# Altium PCB GateWay V1.1.PcbDoc (part 1 of 3)
Units mil, origin at the board's own origin, x right, y up, seen from the top; angles counter-clockwise.
Board outline 3543.31 x 4133.86 mil, 2 copper layers (Top Layer, Bottom Layer); 174 components, 139 nets, 614 pads, 376 vias.
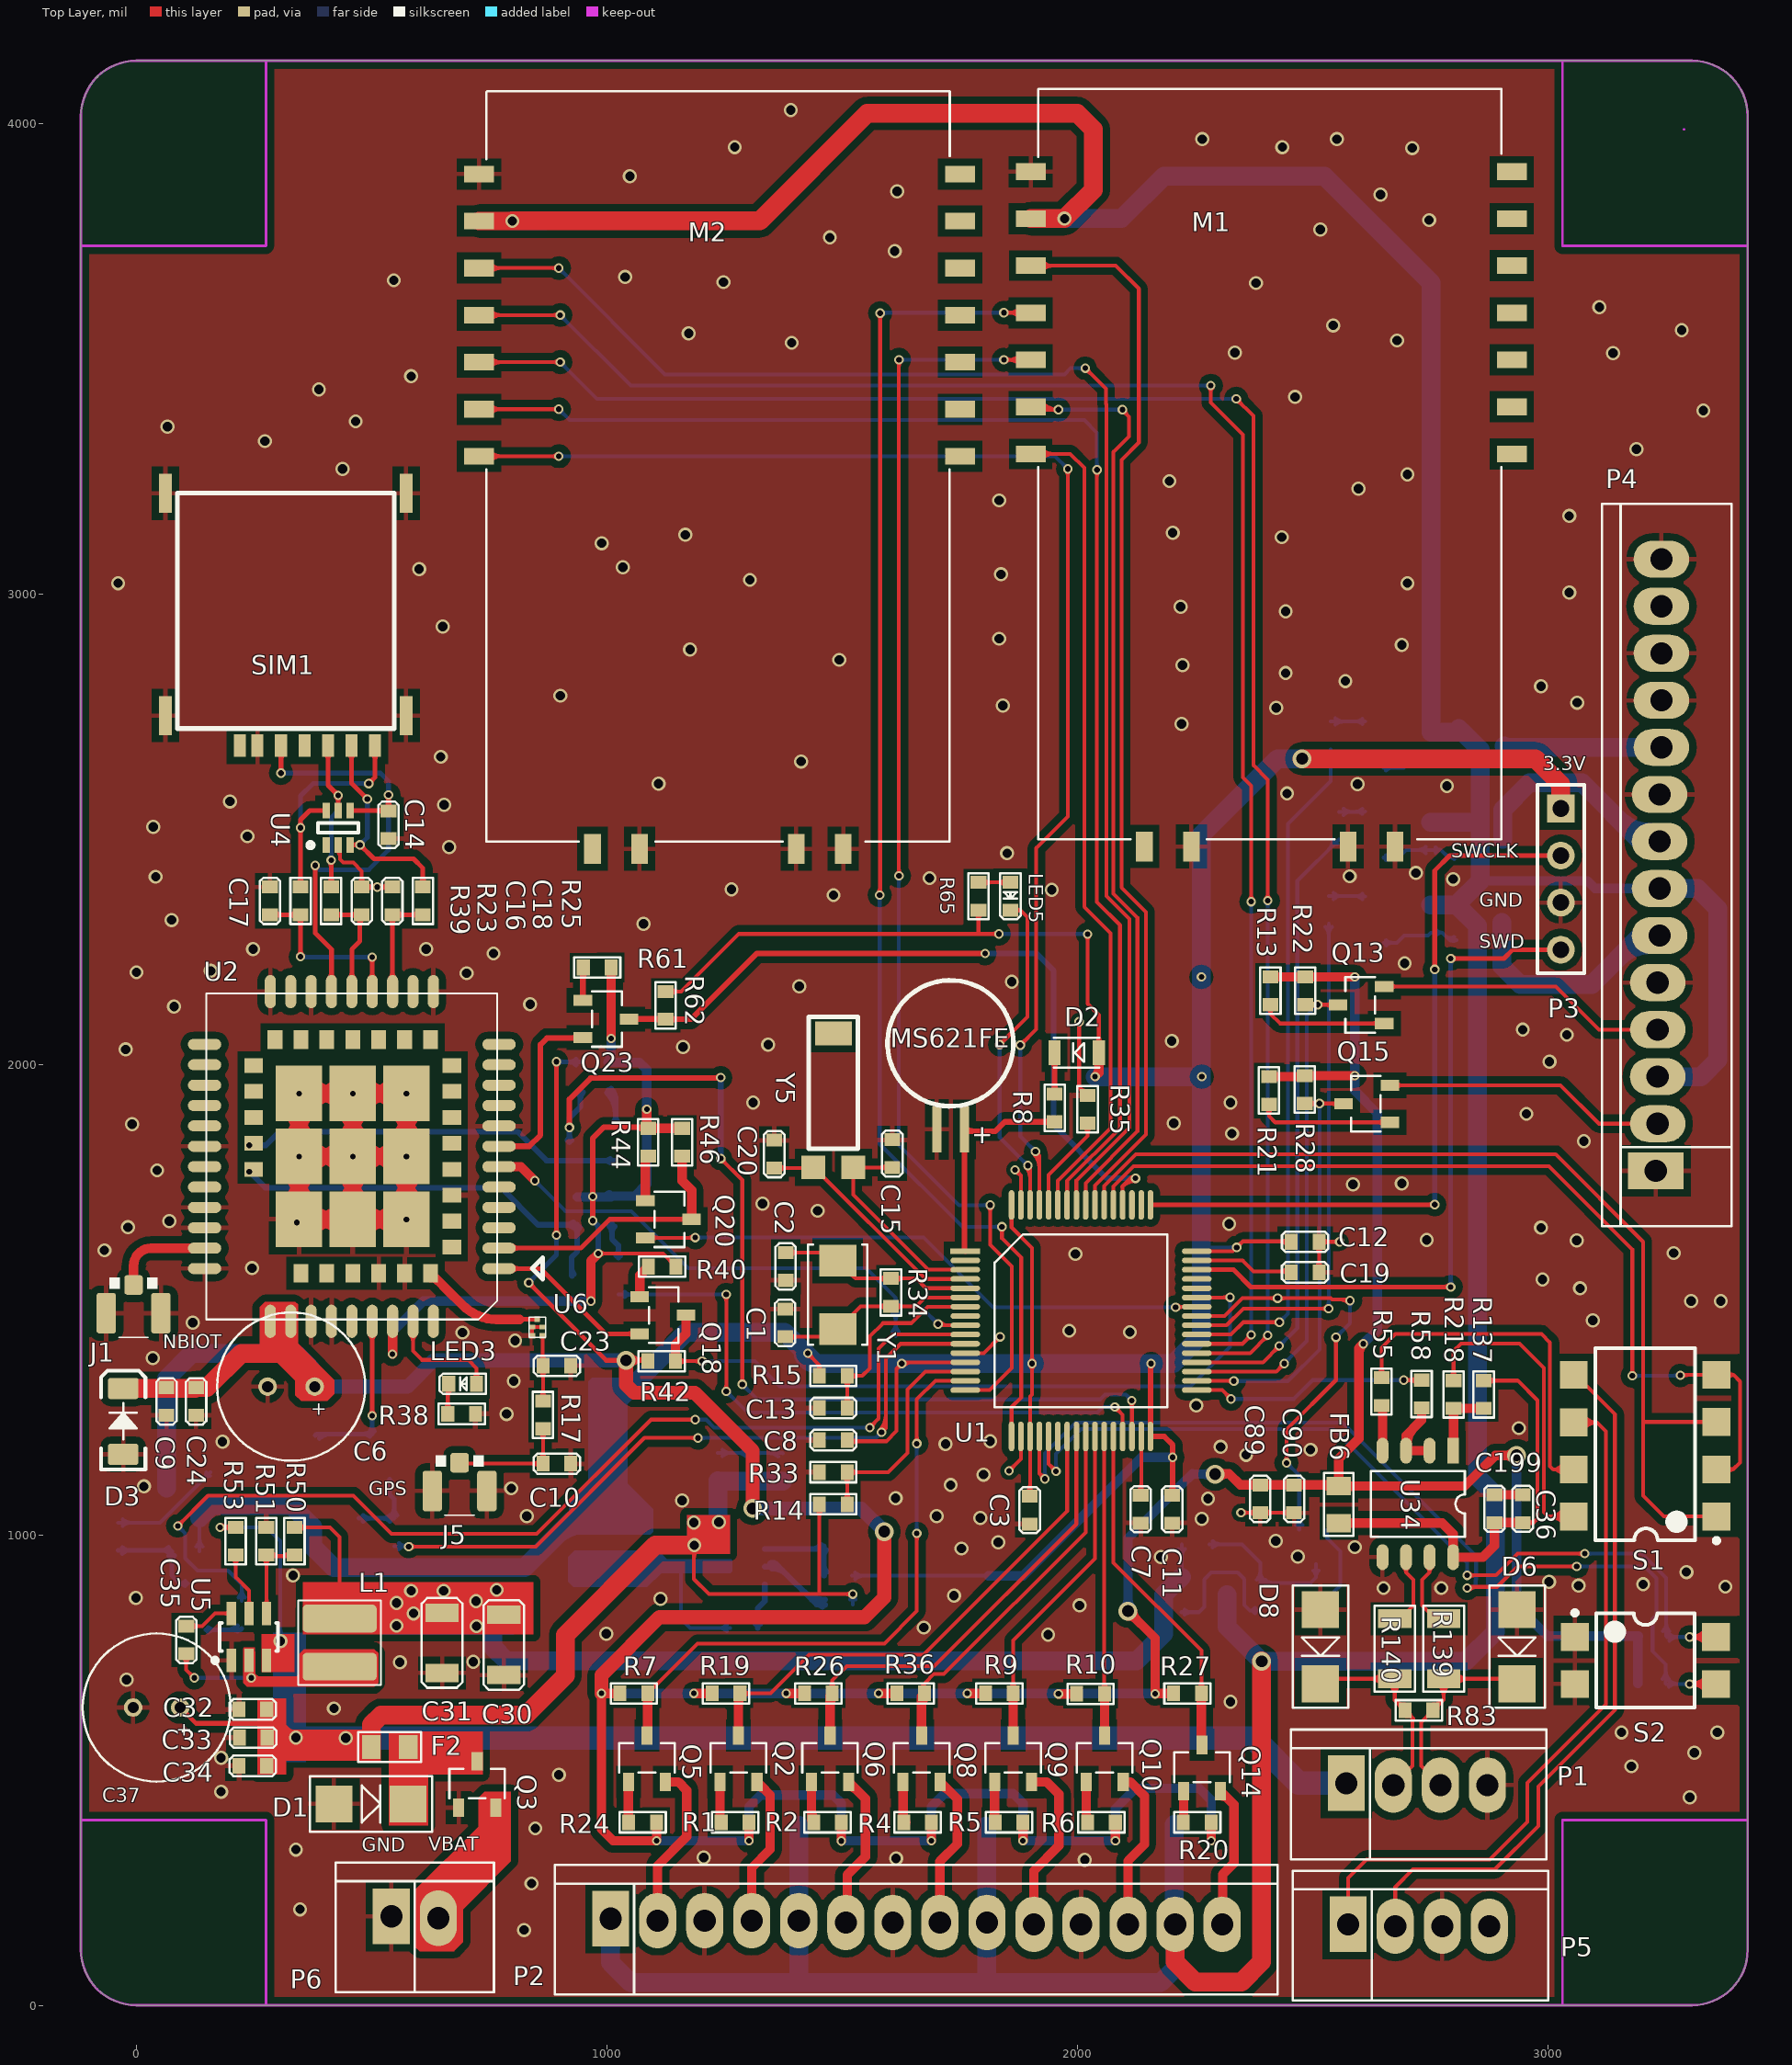
[diagram p0: Top Layer view]
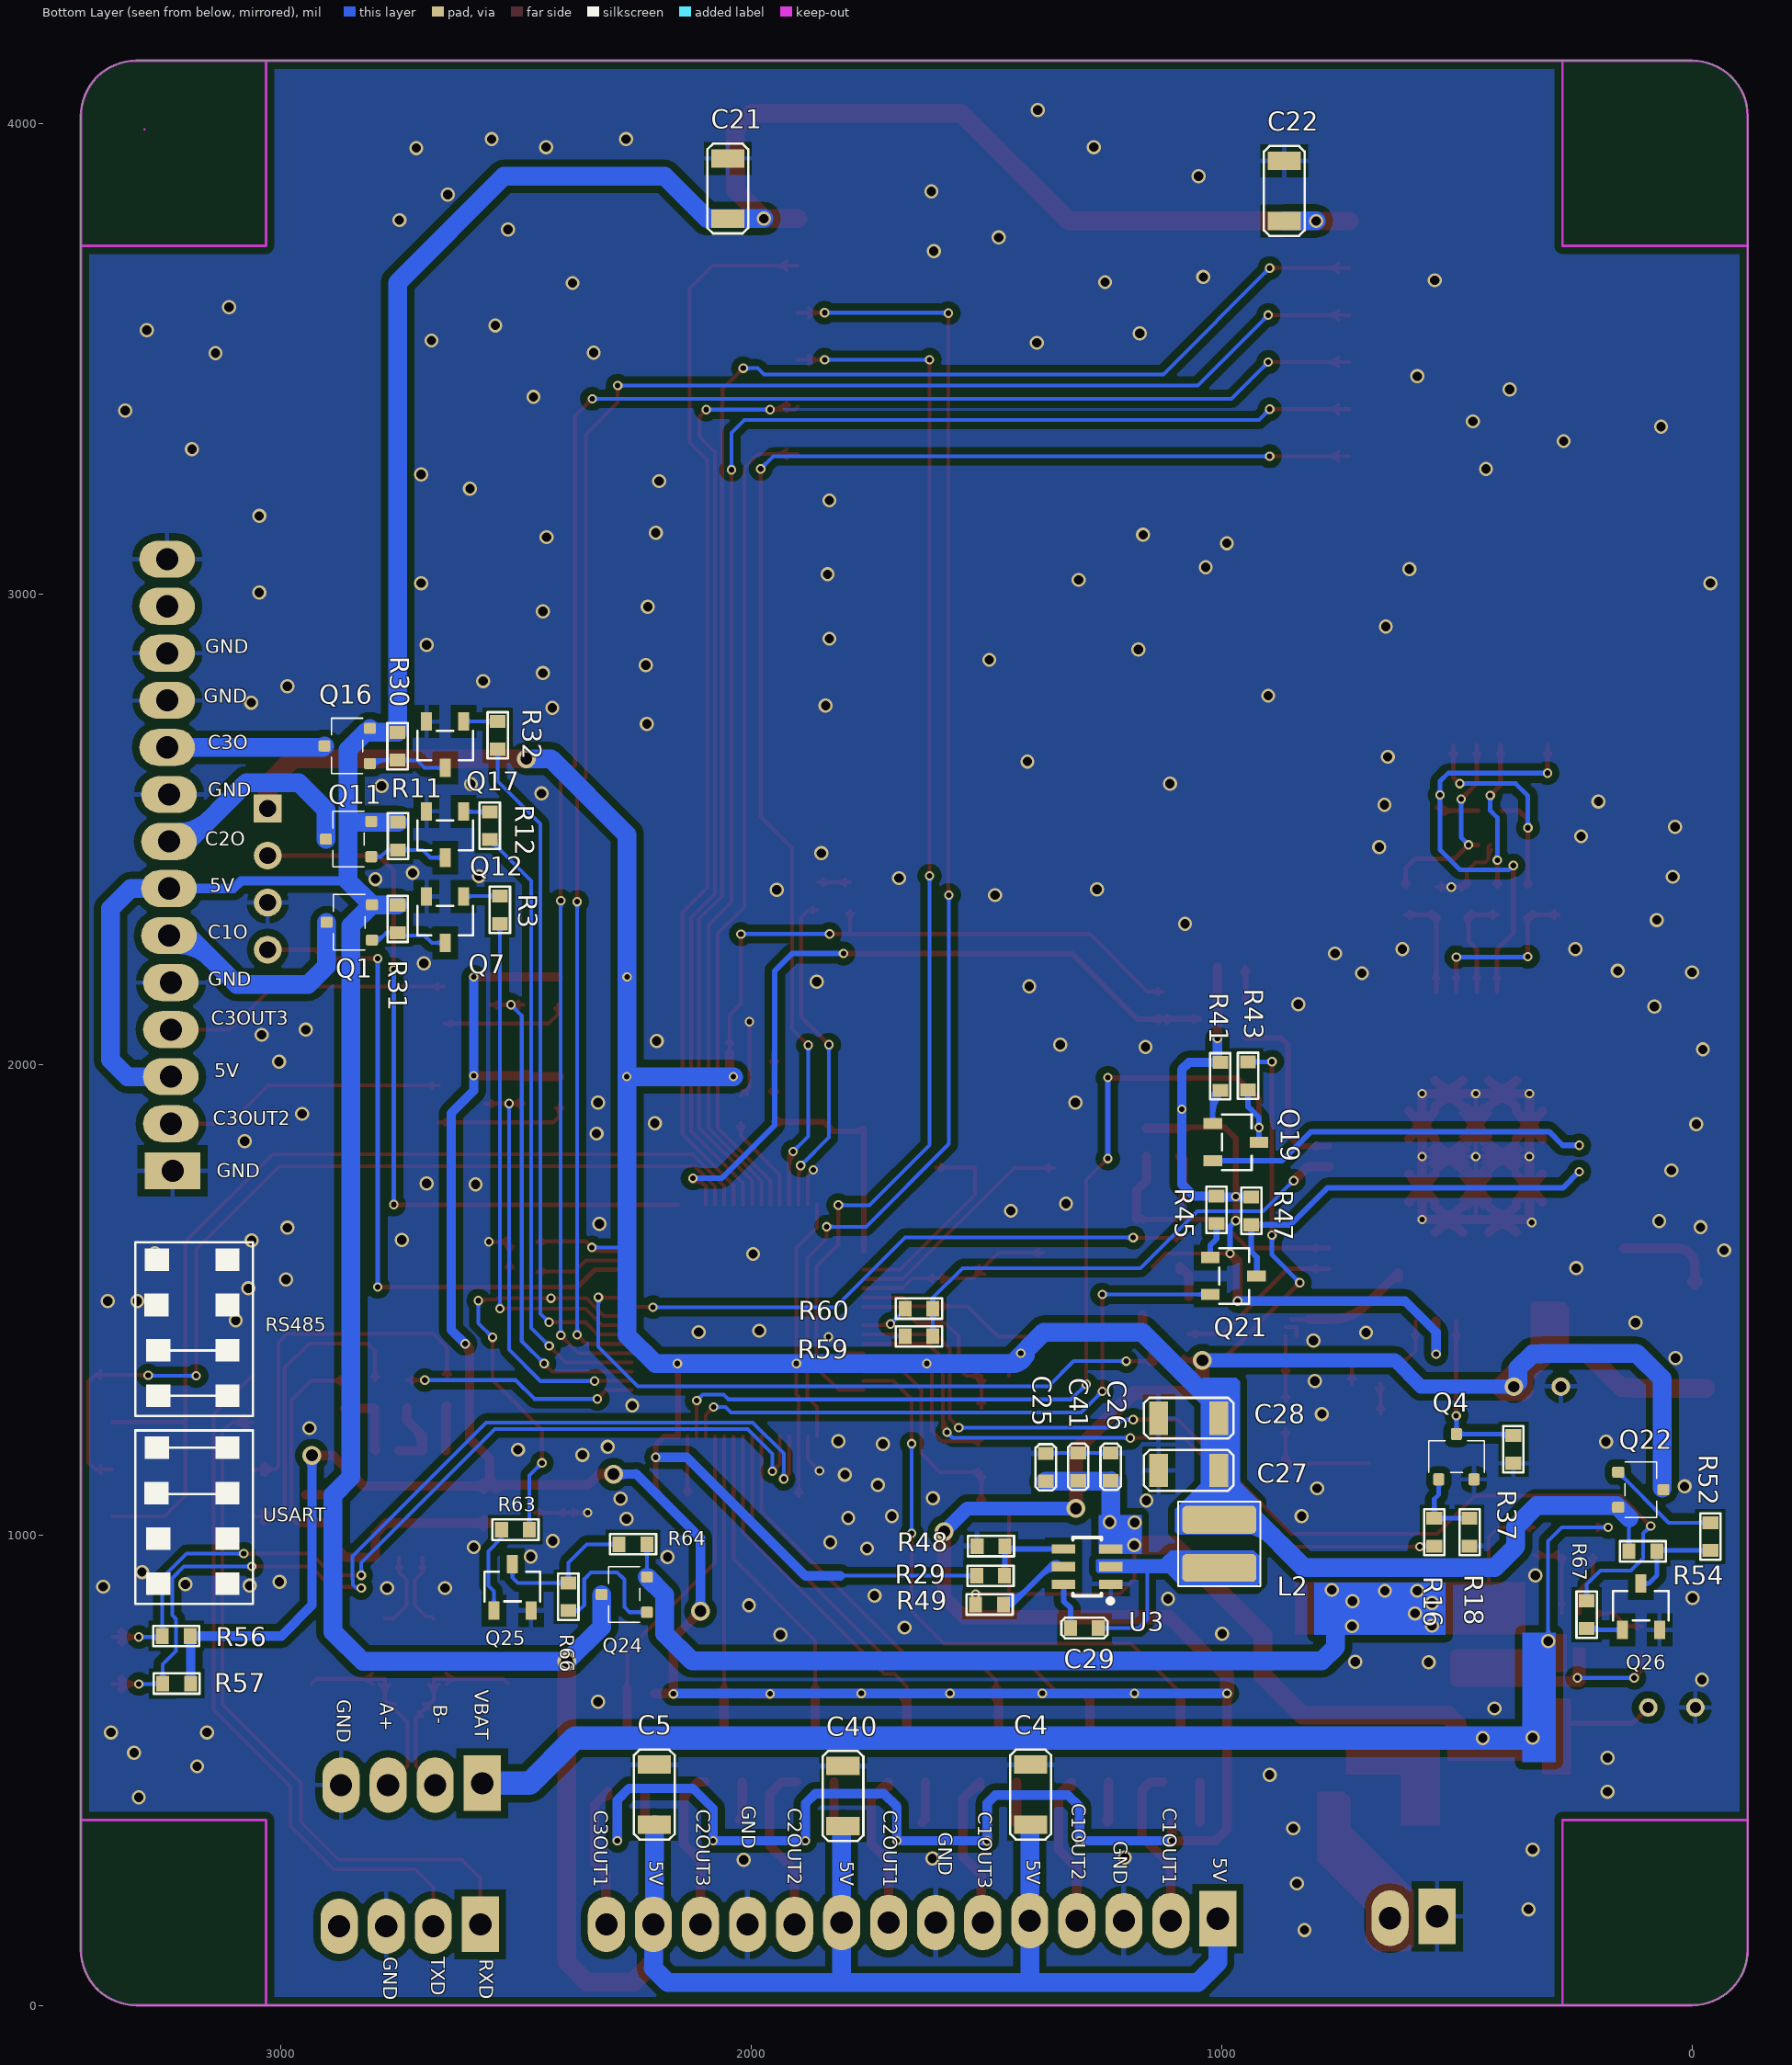
[diagram p1: Bottom Layer view, seen from below]

## Layer stack, top to bottom
Top Layer: signal copper 1.4
Dielectric: dielectric 12.6, FR-4, Dk 4.8
Bottom Layer: signal copper 1.4

## Board outline
-118.11,118.11 ccw(c0,118.11) 0,0 3307.09,0 ccw(c3307.09,118.11) 3425.2,118.11 3425.2,4015.75 ccw(c3307.09,4015.75) 3307.09,4133.86 0,4133.86 ccw(c0,4015.75) -118.11,4015.75

## Design rules (kind name [scope] priority, off if disabled: settings)
Clearance rf [InNetClass('rf')] p1: gap=25
Clearance gnd [InPolygon  And InNet(AGND)] p2: gap=15
Clearance [All] p3: gap=5
DiffPairsRouting [All] p1: maxlimit=10 minlimit=10 mostfreqgap=10 maxuncoupledlength=500
MinimumSolderMaskSliver [All] p1: minsoldermaskwidth=2
PolygonConnect PolygonConnect_1 [IsVia And InNet(AGND)] p1: connectstyle=Direct reliefconductorwidth=10 reliefentries=4 polygonreliefangle="90 Angle"
PolygonConnect [All] p2: connectstyle=Relief reliefconductorwidth=10 reliefentries=4 polygonreliefangle="90 Angle"
RoutingVias [All] p1: holewidth=28 width=50 viastyle="Through Hole" minholewidth=28 minwidth=50 maxholewidth=28 maxwidth=50
SilkscreenOverComponentPads [All] p1: minsilkscreentomaskgap=1
SolderMaskExpansion [All] p1: expansion=4
Width [All] p1: maxlimit=200 minlimit=6 preferedwidth=10
25 further rules are at their usual default settings.

## Classes and differential pairs
component class rs485: C36 C89 C90 C199 D6 D8 FB6 P1 P5 R55 R58 R83 R137 R139 R140 R218 S1 U34
component class POWER: C25 C26 C27 C28 C29 C30 C31 C32 C33 C34 C35 C37 C41 D1 F2 L1 L2 P6 Q3 Q22 Q26 R29 R48 R49 R50 R51 R52 R53 R54 R67 U3 U5
component class nbiot&gps: C6 C9 C10 C14 C16 C17 C18 C23 C24 D3 J1 J5 LED3 Q4 Q18 Q19 Q20 Q21 R16 R17 R18 R23 R25 R37 R38 R39 R40 R41 R42 R43 R44 R45 R46 R47 SIM1 U2 U4 U6
component class LORA: C21 C22 M1 M2 Q24 Q25 R63 R64 R66
component class CPU: C1 C2 C3 C7 C8 C11 C12 C13 C15 C19 C20 D2 LED5 MS621FE P3 Q23 R8 R14 R15 R33 R34 R35 R59 R60 R61 R62 R65 U1 Y1 Y5
component class CONNECTOR: C4 C5 C40 P2 P4 Q1 Q2 Q5 Q6 Q7 Q8 Q9 Q10 Q11 Q12 Q13 Q14 Q15 Q16 Q17 R1 R2 R3 R4 R5 R6 R7 R9 R10 R11 R12 R13 R19 R20 R21 R22 R24 R26 R27 R28 R30 R31 R32 R36 R56 R57 S2
differential pair 4852: +4852_P -4852_N
differential pair 485: +485_P -485_N

## Components (designator, comment, footprint, x,y, rotation, side; value= is the part's Value field where it differs from the comment)
C1 "22pF" 0603c 1379,1480 r270 top
C2 "22pF" 0603c 1380,1541 r90 top
C3 "0.1uF" 0603c 1899,1023 r90 top
C4 "22uF/10V/网关不焊接" 1206C 1406,384 r90 bottom
C5 "22uF/10V/网关不焊接" 1206C 2205.93,384 r90 bottom
C6 "1000uF/6.3V/8*12" 8*12 328.98,1315.19 r0 top
C7 "2.2uF" 0603c 2135,1025 r90 top
C8 "0.1uF" 0603c 1451.94,1201.5 r0 top
C9 "33pF" 0603C 126.98,1254.19 r90 top
C10 "NC" 0603C 864.32,1151.39 r0 top
C11 "0.1uF" 0603c 2202,1025 r90 top
C12 "0.1uF" 0603c 2514,1623 r180 top
C13 "0.1uF" 0603c 1451.94,1269.75 r0 top
C14 "0.1uF" 0603C 536,2480 r90 top
C15 "10pF" 0603c 1607,1840 r270 top
C16 "10pF/NC" 0603C 478.98,2377.19 r270 top
C17 "10pF/NC" 0603C 283.98,2377.19 r270 top
C18 "10pF/NC" 0603C 543.98,2377.19 r270 top
C19 "2.2uF" 0603c 2514,1558 r180 top
C20 "10pF" 0603c 1356,1839 r270 top
C21 "22uF/10V" 1206C 2050,3798 r90 bottom
C22 "22uF/10V" 1206C 867,3793 r90 bottom
C23 "NC" 0603C 864.32,1359.39 r0 top
C24 "10pF" 0603C 63.98,1254.19 r90 top
C25 "0.1uF/25V" 0603C 1374,1173.06 r270 bottom
C26 "0.1uF/25V" 0603C 1236,1174.06 r270 bottom
C27 "22uF/10V" 1206C 1006,1137 r0 bottom
C28 "22uF/10V" 1206C 1006,1248 r0 bottom
C29 "0.1uF" 0603C 1262,802 r0 bottom
C30 "22uF/10V" 1206C 781,830 r270 top
C31 "22uF/10V" 1206C 649.85,834.47 r270 top
C32 "10uF/25V" 0603C 217.94,629 r0 top
C33 "0.1uF/25V" 0603C 218.94,569 r0 top
C34 "0.1uF/25V" 0603C 217.94,509 r0 top
C35 "0.1uF" 0603C 106,747 r90 top
C36 "10uF/25V" 0603C 2947,1085 r270 top
C37 "1000uF/6.3V/8*12" 8*12 43,633 r0 top
C40 "22uF/10V/网关不焊接" 1206C 1805,381 r90 bottom
C41 "10uF/25V" 0603C 1305,1174.06 r270 bottom
C89 "10uF/25V" 0603C 2389,1047 r90 top
C90 "0.01uF" 0603C 2461,1047 r90 top
C199 "0.01uF" 0603C 2887,1085 r270 top
D1 "SMAJ12CA" SMA 420,428 r0 top
D2 "RB751V40T1" SOD323 2046,2025 r180 top
D3 "DIODE_SCHOTTKY_0" LL-34(D1206) -28.02,1241.19 r90 top
D6 "SMAJ6.5CA" SMA 2935,841 r270 top
D8 "SMAJ6.5CA" SMA 2517,841 r270 top
F2 "SMD0805P300" 0805R 578,549 r180 top
FB6 "JWWBW2012 M600HT" 0805CZ 2556,1025 r90 top
J1 "IPEX" RF-UFL -6.02,1471.19 r180 top
J5 "IPEX" RF-UFL 686.98,1093.19 r180 top
L1 "SRP4020TA-3R3M" CD_4*4 432,771 r0 top
L2 "SRP4020TA-3R3M" CD_4*4 1005,981 r180 bottom
LED3 "LED" 0603LED 722.98,1321.19 r180 top
LED5 "LED" 0603LED 1858,2387 r270 top
M1 "E22-400T30S" E22-400T30S 1917,2479 r0 top
M2 "E22-400T30S" E22-400T30S 744,2474 r0 top
MS621FE "SBatery" MS621FE 1731,1862 r270 top
P1 "Header 4" 4X2.54MMZ 2572,472 r0 top
P2 "Header 7X2/网关不焊接" 14X2.54MMZ 1008,184 r0 top
P3 "Header 4" HDR1X4 3028,2544 r270 top
P4 "Header 7X2/网关不焊接" 14X2.54MMZ 3230,1774 r90 top
P5 "Header 4" 4X2.54MMZ 2576,172 r0 top
P6 "Header 2" 2X2.54MMZ 542,189 r0 top
Q1 "Si2369DS/网关不焊接" SOT23 2854.54,2302 r90 bottom
Q2 "MMBT3904/网关不焊接" SOT23-3 1240.6,475 r270 top
Q3 "Si2369DS" sot23-3 685,420 r270 top
Q4 "S8050" SOT23 500.98,1166.19 r180 bottom
Q5 "MMBT3904/网关不焊接" SOT23-3 1046,475 r270 top
Q6 "MMBT3904/网关不焊接" SOT23-3 1435.2,475 r270 top
Q7 "MMBT3904/网关不焊接" SOT23-3 2611.54,2357 r90 bottom
Q8 "MMBT3904/网关不焊接" SOT23-3 1629.8,475 r270 top
Q9 "MMBT3904/网关不焊接" SOT23-3 1824.4,475 r270 top
Q10 "MMBT3904/网关不焊接" SOT23-3 2019,475 r270 top
Q11 "Si2369DS/网关不焊接" SOT23 2856,2479 r90 bottom
Q12 "MMBT3904/网关不焊接" SOT23-3 2611.54,2538 r90 bottom
Q13 "MMBT3904/网关不焊接" SOT23-3 2652.68,2087 r0 top
Q14 "MMBT3904/网关不焊接" SOT23-3 2226,455 r270 top
Q15 "MMBT3904/网关不焊接" SOT23-3 2664.68,1876.94 r0 top
Q16 "Si2369DS/网关不焊接" SOT23 2859,2677 r90 bottom
Q17 "MMBT3904/网关不焊接" SOT23-3 2611.54,2729 r90 bottom
Q18 "MMBT3904" SOT23-3 1069.98,1506.19 r180 top
Q19 "MMBT3904" SOT23-3 1018.98,1874.19 r0 bottom
Q20 "MMBT3904" SOT23-3 1081.98,1710.19 r180 top
Q21 "MMBT3904" SOT23-3 1024.53,1589.69 r0 bottom
Q22 "Si2369DS" SOT23 109,1096 r270 bottom
Q23 "MMBT3904" SOT23-3 949,2136 r180 top
Q24 "Si2369DS" SOT23 2270,873 r90 bottom
Q25 "MMBT3904" SOT23-3 2547,839 r270 bottom
Q26 "MMBT3904" SOT23-3 148,798 r270 bottom
R1 "4.7K/网关不焊接" 0603R 1243.11,389 r0 top
R2 "4.7K/网关不焊接" 0603R 1439.61,389 r0 top
R3 "10k/网关不焊接" 0603R 2534.54,2299 r90 bottom
R4 "4.7K/网关不焊接" 0603R 1631.11,389 r0 top
R5 "4.7K/网关不焊接" 0603R 1825.61,389 r0 top
R6 "4.7K/网关不焊接" 0603R 2022.11,389 r0 top
R7 "4.7K/网关不焊接" 0603R 1087,663 r180 top
R8 "1K" 0603R 1952,1937 r270 top
R9 "4.7K/网关不焊接" 0603R 1864,663 r180 top
R10 "4.7K/网关不焊接" 0603R 2058,662 r180 top
R11 "10k/网关不焊接" 0603R 2751,2456 r90 bottom
R12 "10k/网关不焊接" 0603R 2556,2478 r90 bottom
R13 "4.7K/网关不焊接" 0603R 2410.68,2127 r90 top
R14 "330K/1%" 0603R 1451.94,1065 r0 top
R15 "10K" 0603R 1451.94,1338 r0 top
R16 "4.7K" 0603R 547.98,1035.19 r270 bottom
R17 "0" 0603R 864.32,1284.39 r270 top
R18 "47K" 0603R 472.98,1035.19 r270 bottom
R19 "4.7K/网关不焊接" 0603R 1283.17,663 r180 top
R20 "4.7K/网关不焊接" 0603R 2225.61,389 r0 top
R21 "4.7K/网关不焊接" 0603R 2407.68,1915 r90 top
R22 "4.7K/网关不焊接" 0603R 2484.68,2127 r90 top
R23 "10R" 0603R 413.98,2318.13 r90 top
R24 "4.7K/网关不焊接" 0603R 1046.61,389 r0 top
R25 "10R" 0603R 608.98,2318.13 r90 top
R26 "4.7K/网关不焊接" 0603R 1479.33,663 r180 top
R27 "4.7K/网关不焊接" 0603R 2264,663 r180 top
R28 "4.7K/网关不焊接" 0603R 2483.68,1917 r90 top
R29 "332K/1%" 0603R 1521,913 r180 bottom
R30 "10k/网关不焊接" 0603R 2752,2647 r90 bottom
R31 "10k/网关不焊接" 0603R 2751.54,2280 r90 bottom
R32 "10k/网关不焊接" 0603R 2539,2670 r90 bottom
R33 "51K/1%" 0603R 1511,1133.25 r180 top
R34 "1MR" 0603R 1604,1545 r270 top
R35 "100K" 0603R 2022,1875 r90 top
R36 "4.7K/网关不焊接" 0603R 1675.5,663 r180 top
R37 "1K" 0603R 379.98,1211.19 r270 bottom
R38 "1K" 0603R 661.98,1257.19 r0 top
R39 "10R" 0603R 348.98,2318.13 r90 top
R40 "4.7K" 0603R 1087.98,1570.19 r0 top
R41 "4.7K" 0603R 1002.98,1945.19 r90 bottom
R42 "10K" 0603R 1145.98,1369.19 r180 top
R43 "10K" 0603R 943.98,1946.19 r90 bottom
R44 "4.7K" 0603R 1087.98,1805.19 r90 top
R45 "4.7K" 0603R 1010.98,1661.19 r90 bottom
R46 "4.7K" 0603R 1159.98,1805.19 r90 top
R47 "4.7K" 0603R 936.98,1659.19 r90 bottom
R48 "100K/1%" 0603R 1520,976 r180 bottom
R49 "10K/1%" 0603R 1523,852 r180 bottom
R50 "549K/1%" 0603R 336,1016 r270 top
R51 "100K/1%" 0603R 276,1016 r270 top
R52 "10k" 0603R -39,967 r90 bottom
R53 "10K/1%" 0603R 211,957 r90 top
R54 "10k" 0603R 75,965 r0 bottom
R55 "1K" 0603R 2647,1275 r90 top
R56 "10k/网关不焊接" 0603R 3252,785 r180 bottom
R57 "10k/网关不焊接" 0603R 3251,684 r180 bottom
R58 "1K" 0603R 2732,1270 r90 top
R59 "4.7K" 0603R 1673,1422 r180 bottom
R60 "4.7K" 0603R 1614,1481 r0 bottom
R61 "4.7K" 0603R 950,2206 r0 top
R62 "4.7K" 0603R 1125,2096 r90 top
R63 "10k" 0603R 2531,1011 r180 bottom
R64 "10k" 0603R 2281,980 r180 bottom
R65 "1K" 0603R 1790,2387 r270 top
R66 "10k" 0603R 2389,898 r270 bottom
R67 "10k" 0603R 224,801 r90 bottom
R83 "100" 0603R 2697,627 r0 top
R137 "100k" 0603R 2864,1269 r90 top
R139 "10" 1206R 2779,694 r90 top
R140 "10" 1206R 2675,694 r90 top
R218 "1K" 0603R 2800,1269 r90 top
S1 "SW DIP-4" SW_SMT_8 3209,1089 r180 top
S2 "SW DIP-2" SW_SMT_4 3208,733 r0 top
SIM1 "microsim" "Nano SIM" 220,2678 r180 top
U1 "STM32F405RGT6" LQFP-64 1762,1603 r0 top
U2 "SIM7080G" SIM868 770.98,1566.19 r180 top
U3 "TPS562201" SOT-23-6 1236,895 r0 bottom
U4 "SMF05C_1" SC70-6L 428.98,2503.19 r90 top
U5 "TPS562201" SOT-23-6 202,733 r90 top
U6 "SAFFB1G56KB0F0A" SAFFB1G56KB0F0A 852.32,1458.73 r270 top
U34 "THVD1500" so-8 2799,1179 r270 top
Y1 "8MHz" CRAY_5032 1491,1583 r270 top
Y5 "32.768K" 32.768K 1524,1781 r180 top

## Footprints (in the part's own frame and the unit in brackets; to place one, negate y for a bottom-side part, rotate by r counter-clockwise, add the part's x,y. Pads: shape width x height; smd on the part's side, far side on the other; paste and mask are expansions set on the pad)
2X2.54MMZ [mm]
  rect 2x3 hole 1.2: 1(0,0)
  oval 2x3 hole 1.2: 2(2.54,-0.1)
  silkscreen extent -3,-4.1 5.54,2.9
4X2.54MMZ [mm]
  rect 2x3 hole 1.2: 1(0,0)
  oval 2x3 hole 1.2: 2(2.54,-0.1) 3(5.08,-0.1) 4(7.62,-0.1)
  silkscreen extent -3,-4.1 10.79,2.9
8*12 [mm]
  round 1 hole 0.6: 1(1.27,0) 2(-1.27,0)
  silkscreen extent -4,-4 4,4
14X2.54MMZ [mm]
  rect 2x3 hole 1.2: 1(0,0)
  oval 2x3 hole 1.2: 2(2.54,-0.1) 3(5.08,-0.1) 4(7.62,-0.1) 5(10.16,-0.1) 6(12.7,-0.2) 7(15.24,-0.2) 8(17.78,-0.2) 9(20.32,-0.2) 10(22.86,-0.3) 11(25.4,-0.3) 12(27.94,-0.3) 13(30.48,-0.3) 14(33.02,-0.3)
  silkscreen extent -3,-4.1 36.02,2.9
32.768K [mil]
  rect 50x50 smd: 1(0,0) 2(85,0)
  rect 78.74x50 smd: 3(42.13,-285)
  silkscreen extent -10,-320 95,-40
0603c [mm]
  rect 0.7x0.85 smd: 1(0,0) 2(1.5,0)
  silkscreen extent -0.5,-0.55 2,0.55
0603C [mm]
  rect 0.7x0.85 smd: 1(0,0) 2(1.5,0)
  silkscreen extent -0.5,-0.55 2,0.55
0603LED [mm]
  rect 0.7x0.85 smd: 1(0,0) 2(1.5,0)
  silkscreen extent -0.5,-0.55 2,0.55
0603R [mm]
  rect 0.7x0.85 smd: 1(0,0) 2(1.5,0)
  silkscreen extent -0.5,-0.55 2,0.55
0805CZ [mm]
  rect 1x1.3 smd: 1(0,0) 2(2,0)
  silkscreen extent -0.7,-0.8 2.7,0.8
0805R [mm]
  rect 1x1.3 smd: 1(0,0) 2(2,0)
  silkscreen extent -0.7,-0.8 2.7,0.8
1206C [mm]
  rect 1x1.8 smd: 1(0,0) 2(3.25,0)
  silkscreen extent -0.8,-1.1 4.05,1.1
1206R [mm]
  rect 1x1.8 smd: 1(0,0) 2(3.25,0)
  silkscreen extent -0.7,-1.1 3.95,1.1
CD_4*4 [mm]
  rrect30% 4x1.5 smd: 1(0,-1.3) 2(0,1.3)
  silkscreen extent -2.23,-2.3 2.22,2.28, body extent -2,-2 2,2, height 1
CRAY_5032 [mm]
  rect 1.7x2 smd: 1(0,0) 2(3.7,0)
  silkscreen extent -0.86,-1.6 4.55,1.6
E22-400T30S [mm]
  rect 1.6x0.9 smd: 1(-0.4,20.8) 2(-0.4,23.34) 3(-0.4,25.88) 4(-0.4,28.42) 5(-0.4,30.96) 6(-0.4,33.5) 7(-0.4,36.04) 8(25.578,36.04) 9(25.578,33.5) 10(25.578,30.96) 11(25.578,28.42) 12(25.578,25.88) 13(25.578,23.34) 14(25.578,20.8)
  rect 0.9x1.6 smd: 15(19.27,-0.4) 16(16.73,-0.4) 17(8.27,-0.4) 18(5.73,-0.4)
  silkscreen extent 0,0 25.02,40.5
HDR1X4 [mm] "Connector; Header; 4 Position"
  rect 1.5x1.5 hole 0.9: 1(0,0)
  round 1.5 hole 0.9: 2(2.54,0) 3(5.08,0) 4(7.62,0)
  silkscreen extent -1.27,-1.27 8.89,1.27
LL-34(D1206) [mil]
  rrect25% 45x65 smd: 1(-70,0) 2(70,0)
  silkscreen extent -102,-47 108,47, body extent -70,-28 68,30, height 56
LQFP-64 [mm]
  rect 1.6x0.3 smd: 1(0,0)
  oval 1.6x0.3 smd: 2(0,-0.5) 3(0,-1) 4(0,-1.5) 5(0,-2) 6(0,-2.5) 7(0,-3) 8(0,-3.5) 9(0,-4) 10(0,-4.5) 11(0,-5) 12(0,-5.5) 13(0,-6) 14(0,-6.5) 15(0,-7) 16(0,-7.5) 33(12.5,-7.5) 34(12.5,-7) 35(12.5,-6.5) 36(12.5,-6) 37(12.5,-5.5) 38(12.5,-5) 39(12.5,-4.5) 40(12.5,-4) 41(12.5,-3.5) 42(12.5,-3) 43(12.5,-2.5) 44(12.5,-2) 45(12.5,-1.5) 46(12.5,-1) 47(12.5,-0.5) 48(12.5,0)
  oval 0.3x1.6 smd: 17(2.5,-10) 18(3,-10) 19(3.5,-10) 20(4,-10) 21(4.5,-10) 22(5,-10) 23(5.5,-10) 24(6,-10) 25(6.5,-10) 26(7,-10) 27(7.5,-10) 28(8,-10) 29(8.5,-10) 30(9,-10) 31(9.5,-10) 32(10,-10) 49(10,2.5) 50(9.5,2.5) 51(9,2.5) 52(8.5,2.5) 53(8,2.5) 54(7.5,2.5) 55(7,2.5) 56(6.5,2.5) 57(6,2.5) 58(5.5,2.5) 59(5,2.5) 60(4.5,2.5) 61(4,2.5) 62(3.5,2.5) 63(3,2.5) 64(2.5,2.5)
  silkscreen extent 1.59,-8.41 10.91,0.91
MS621FE [mm]
  rect 2.5x0.5 smd: 1(0,-0.749) 2(0,0.749)
  silkscreen extent -8.05,-3.41 -1.25,3.39
"Nano SIM" [mm]
  rect 0.7x2.1 smd: 0(-8.97,-1.615) 0(-8.97,-13.615) 0(4.02,-1.615) 0(4.02,-13.615)
  rect 0.65x1.23 smd: 1(-2.22,0) 2(-4.76,0) 3(-7.3,0) 5(-0.95,0) 6(-3.49,0) 7(-6.03,0) 8(0,0)
  silkscreen extent -8.33,-13.64 3.38,-0.91
RF-UFL [mm]
  rrect30% 1x1.05 smd: 1(0,-1.525)
  rrect30% 1.05x2.2 smd: 2(-1.475,0) 2(1.475,0)
  silkscreen extent -1.3,-1.93 1.3,1.3, body extent -1.7,-1.55 1.7,1.55, height 1.25
SAFFB1G56KB0F0A [mm]
  rect 0.3x0.3 smd: 1(0,0)
  rect 0.25x0.35 smd: 2(0.425,-0.288) 5(0.425,0.288)
  rect 0.3x0.35 smd: 3(0.9,-0.288) 4(0.9,0.288)
  silkscreen extent -0.1,-0.44 1,0.46
SC70-6L [mm]
  rect 0.85x0.4 smd: 1(-0.925,0.65) 2(-0.925,0) 3(-0.925,-0.65) 4(0.925,-0.65) 5(0.925,0) 6(0.925,0.65)
  silkscreen extent -1.09,-1.1 0.25,1.65
SIM868 [mm]
  oval 1.8x0.6 smd: 1(0,0) 2(0,-1.1) 3(0,-2.2) 4(0,-3.3) 5(0,-4.4) 6(0,-5.5) 7(0,-6.6) 8(0,-7.7) 9(0,-8.8) 10(0,-9.9) 11(0,-11) 12(0,-12.1) 22(15.9,-12.1) 23(15.9,-11) 24(15.9,-9.9) 25(15.9,-8.8) 26(15.9,-7.7) 27(15.9,-6.6) 28(15.9,-5.5) 29(15.9,-4.4) 30(15.9,-3.3) 31(15.9,-2.2) 32(15.9,-1.1) 33(15.9,0)
  oval 0.6x1.8 smd: 13(3.55,-14.95) 14(4.65,-14.95) 15(5.75,-14.95) 16(6.85,-14.95) 17(7.95,-14.95) 18(9.05,-14.95) 19(10.15,-14.95) 20(11.25,-14.95) 21(12.35,-14.95) 34(12.35,2.85) 35(11.25,2.85) 36(10.15,2.85) 37(9.05,2.85) 38(7.95,2.85) 39(6.85,2.85) 40(5.75,2.85) 41(4.65,2.85) 42(3.55,2.85)
  rect 1x0.8 smd: 43(2.549,-1.159) 44(2.549,-2.559) 45(2.549,-3.959) 46(2.549,-5.359) 47(2.549,-6.759) 48(2.549,-8.159) 49(2.549,-9.559) 50(2.549,-10.959) 58(13.251,-10.959) 59(13.251,-9.559) 60(13.251,-8.159) 61(13.251,-6.759) 62(13.251,-5.359)
  rect 0.8x1 smd: 51(3.7,-12.359) 52(5.1,-12.359) 53(6.5,-12.359) 54(7.9,-12.359) 55(9.3,-12.359) 56(10.7,-12.359) 57(12.1,-12.359) 63(10.7,0.25) 64(9.3,0.25) 65(7.9,0.25) 66(6.5,0.25) 67(5.1,0.25) 68(3.7,0.25)
  rect 2.5x3 smd: 69(5,-2.65) 70(5,-6.05) 71(5,-9.45) 72(7.9,-9.45) 73(10.8,-9.45) 74(10.8,-6.05) 75(10.8,-2.65) 76(7.9,-2.65) 77(7.9,-6.05)
  silkscreen extent -2.35,-14.85 15.8,2.75
SMA [mm]
  rect 2x2 smd: 1(0,0) 2(4,0)
  silkscreen extent -1.3,-1.5 5.3,1.5
so-8 [mil]
  rect 55x25 smd: 1(0,0)
  oval 55x25 smd: 2(0,-50) 3(0,-100) 4(0,-150) 5(226.38,-150) 6(226.38,-100) 7(226.38,-50) 8(226.38,0)
  silkscreen extent 43,-175 183,25
SOD323 [mm]
  rect 0.65x1.35 smd: 1(0,0) 2(2.4,0)
  silkscreen extent -0.03,-0.8 2.44,0.8
SOT23 [mm]
  rrect30% 0.6x0.65 smd: 1(-0.95,-1.225) 2(0.95,-1.225) 3(0,1.225)
  silkscreen extent -1.5,-0.85 1.5,0.85, body extent -1.45,-1.4 1.45,1.4, height 1.2
SOT23-3 [mm]
  rect 1x0.6 smd: 1(0,0) 2(0,2) 3(-2.5,1)
  silkscreen extent -2.1,-0.5 -0.5,2.5
sot23-3 [mm]
  rect 1x0.6 smd: 1(0,0) 2(0,2) 3(-2.5,1)
  silkscreen extent -2.1,-0.5 -0.5,2.5
SOT-23-6 [mil]
  rect 50x20 smd: 1(0,0) 2(0,-37.4) 3(0,-74.8) 4(100,-74.8) 5(100,-37.4) 6(100,0)
  silkscreen extent 0,-99 80,35
SW_SMT_4 [mm] "DIP; 4 Leads; Row Spacing 7.62 mm; Pitch 2.54 mm"
  rect 1.5x1.5 smd: 1(-3.81,1.27) 2(-3.81,-1.27) 3(3.81,-1.27) 4(3.81,1.27)
  silkscreen extent -3.93,-2.55 2.65,2.69
SW_SMT_8 [mm] "DIP; 4 Leads; Row Spacing 7.62 mm; Pitch 2.54 mm"
  rect 1.5x1.5 smd: 1(-3.81,1.27) 2(-3.81,-1.27) 3(-3.81,-3.835) 4(-3.81,-6.375) 5(3.9,-6.375) 6(3.9,-3.81) 7(3.9,-1.27) 8(3.9,1.27)
  silkscreen extent -3.94,-7.82 2.74,2.69

## Part data
C1 C2 C3 C4 C5 C7 C8 C9 C11 C12 C13 C14 C15 C16 C17 C18 C19 C20 C21 C22 C24 C25 C26 C27 C28 C29 C30 C31 C32 C33 C34 C35 C40 C41: library part CAP, "Capacitor"
C6 C37: library part "Cap Pol3", "Polarized Capacitor (Surface Mount)"
C10 C23: library part Cap, "Capacitor"
C36 C89 C90 C199: library part C, "C"
D1: library part DIODE_SCHOTTKY_0
D2: library part Diode, "Default Diode"
D6 D8: library part "DIODE S", "Schottky Diode"
F2: library part "Fuse 2", "Fuse"
FB6: library part FB
J1 J5: library part ANT
L1 L2: library part INDUCTOR_1
P1 P3 P5: "Header, 4-Pin"
P2 P4: library part "Header 7X2", "Header, 7-Pin, Dual row"
P6: "Header, 2-Pin"
Q1 Q11 Q16 Q22 Q24: library part "MOSFET P_1"
Q2 Q5 Q6 Q7 Q8 Q9 Q10 Q12 Q13 Q14 Q15 Q17 Q18 Q19 Q20 Q21 Q23 Q25 Q26: library part NPN
Q3: library part NCE4060K, "NMOSFET"
Q4: library part 2N1069_1
R1 R2 R3 R4 R5 R6 R7 R9 R10 R11 R12 R13 R16 R18 R19 R20 R21 R22 R23 R24 R25 R26 R27 R28 R29 R30 R31 R32 R36 R37 R38 R39 R40 R41 R42 R43 R44 R45 R46 R47 R48 R49 R50 R51 R52 R53 R54 R56 R57 R59 R60 R61 R62 R63 R64 R65 R66 R67: library part RES1
R8 R17: library part Res2, "Resistor"
R14 R15 R33 R34 R35: library part Res3, "Resistor"
R55 R58 R83 R218: library part R, "R"
R137 R139 R140: library part RES2
S1: "DIP Switch, 4 Position, SPST"
S2: "DIP Switch, 2 Position, SPST"
U1: "ARM Cortex-M4 32-bit MCU+FPU, 210 DMIPS, 1024 kB Flash, 192 kB Internal RAM, 51 I/Os, 64-pin LQFP, -40 to 85 degC, Tray"
U2: library part SIM868E/SIM868
U4: "TVS"
U6: library part SAFFB1G56KBOFA
U34: library part SN65HVD06D
Y1 Y5: library part XTAL, "Crystal Oscillator"

## Via types
v1: diameter 30, hole 20, Top Layer to Bottom Layer, tented both sides, 218 vias
v2: diameter 20, hole 12, Top Layer to Bottom Layer, tented both sides, 150 vias
v3: diameter 40, hole 25, Top Layer to Bottom Layer, tented both sides, 8 vias

## Nets (pads, with @x,y where several pads share a name; then routed paths per layer and width w, separated by ;. In a path a pad name is that pad's centre, name@x,y a point inside that pad or via, vN(x,y) a via of type N, cw(c..) or ccw(c..) an arc to the next point about the centre after c; other vN are vias at no path point)
485_3.3V1: C36.2 C199.2 FB6.1 R137.2 U34.8 | length 1029
  Top Layer w8: R137.2@2864,1328.06 2935.94,1328.06 2978,1286 2978,1033.94 2970,1025.94 ; R137.2@2873.87,1321.14 cw(c2890.56,1304.45) 2890.56,1328.06 cw(c2890.56,1351.66) R137.2@2873.87,1334.97 ; C36.2@2947,1025.94 2970,1025.94 ; C36.2@2957.66,1019.93 cw(c2970,1010.29) 2970,1025.94 ; C36.2@2957.66,1031.96 ccw(c2970,1041.6) 2970,1025.94
  Top Layer w20: FB6.1@2556,1025 2776,1025 2799,1002 U34.8@2799,952.62 2862.62,952.62 2887,977 C199.2@2887,1025.94 C36.2@2947,1025.94 ; FB6.1@2568.75,1018.15 cw(c2585.29,1001.62) 2585.29,1025 cw(c2585.29,1048.38) FB6.1@2568.75,1031.85
485_EN1: R58.2 U1.33 | length 630.3
  Top Layer w8: U1.33@2254.13,1307.72 2308.28,1307.72 v2(2327,1289) ; v2@2321,1289 ccw(c2306.51,1289) 2316.76,1299.24 ccw(c2327,1309.49) v2@2327,1295 ; v2(2694,1329) v2(2694,1329) R58.2@2732,1329.06 ; v2@2698.24,1324.76 cw(c2708.62,1314.38) 2708.62,1329.06 ; v2@2698.24,1333.24 ccw(c2708.35,1343.35) 2708.35,1329.06 ; R58.2@2722.13,1322.14 ccw(c2705.44,1305.45) 2705.44,1329.06 ccw(c2705.44,1352.66) R58.2@2722.13,1335.97
  Bottom Layer w8: v2(2327,1289) 2461,1289 2501,1329 v2(2694,1329) ; v2@2331.24,1284.76 cw(c2341.49,1274.51) 2341.49,1289 cw(c2341.49,1303.49) v2@2331.24,1293.24 ; v2@2689.76,1324.76 ccw(c2679.51,1314.51) 2679.51,1329 ccw(c2679.51,1343.49) v2@2689.76,1333.24
485_N: D6.2 P1.3 R83.2 R139.1 | length 602.4
  Top Layer w8: 2731,586.17 2731,563 ; R83.2@2756.06,639.73 ccw(c2756.06,670.47) 2777.79,648.74 ; R83.2@2765.83,629.95 cw(c2782.32,629.95) 2770.66,641.61 ; R139.1@2767.91,682.91 cw(c2741.13,656.13) 2779,656.13 cw(c2816.87,656.13) R139.1@2790.09,682.91 ; P1.3@2772,468.06 2731,509.06 2731,563 ; R139.1@2805.84,682.91 cw(c2832.61,656.13) 2832.61,694 cw(c2832.61,731.87) R139.1@2805.84,705.09 ; D6.2@2935,683.52 2924.52,694 R139.1@2779,694 2779,649.94 R83.2@2756.06,627 2731,601.94 2731,563
485_P: D8.2 P1.2 R83.1 R140.1 | length 618.3
  Top Layer w8: D8.2@2517,683.52 2527.48,694 R140.1@2675,694 2675,649 R83.1@2697,627 2713,611 2713,573 ; R140.1@2648.16,682.91 ccw(c2621.39,656.13) 2621.39,694 ccw(c2621.39,731.87) R140.1@2648.16,705.09 ; R140.1@2663.91,682.91 cw(c2637.13,656.13) 2675,656.13 cw(c2712.87,656.13) R140.1@2686.09,682.91 ; P1.2@2672,468.06 2713,509.06 2713,573 ; 2676.48,647.52 ccw(c2695.37,666.42) R83.1@2696.56,639.72 ; 2682.39,641.61 cw(c2670.74,629.95) R83.1@2687.22,629.95 ; R83.1@2698.76,614.43 cw(c2701.94,596.99) 2714.48,609.52 ; R83.1@2706.78,624.05 ccw(c2723.26,624.05) 2711.61,612.39 ; 2713,586.17 2713,573
4852_N: R140.2 U34.6 | length 185
  Top Layer w8: R140.2@2675,821.95 2679.09,826.05 2691.53,826.05 2715,849.51 2715,904.53 2699,920.53 ; U34.6@2693.87,930.84 cw(c2686.08,920.53) 2699,920.53 ; U34.6@2699,952.62 2699,920.53 ; U34.6@2704.13,930.84 ccw(c2711.92,920.53) 2699,920.53
4852_P: R139.2 U34.7 | length 191
  Top Layer w8: U34.7@2743.87,930.84 cw(c2736.08,920.53) 2749,920.53 ; U34.7@2749,952.62 2749,920.53 ; U34.7@2754.13,930.84 ccw(c2761.92,920.53) 2749,920.53 ; R139.2@2779,821.95 2760.56,821.95 2733,849.51 2733,904.53 2749,920.53
AGND: C1.1 C2.1 C3.1 C4.2 C5.2 C6.2 C7.1 C8.1 C9.1 C10.2 C11.1 C12.1 C13.1 C14.1 C15.1 C16.1 C17.1 C18.1 C19.1 C20.1 C21.2 C22.2 C23.2 C24.1 C25.1 C26.1 C27.2 C28.2 C30.2 C31.2 C32.1 C33.1 C34.1 C36.1 C37.2 C40.2 C41.1 C89.1 C90.1 C199.1 D1.1 D3.1 D6.1 D8.1 J1.2 J5.2 M1.7 M1.15 M1.16 M1.17 M2.7 M2.15 M2.16 M2.17 MS621FE.1 P1.4 P2.3 P2.7 P2.11 P3.3 P4.1 P4.5 P4.9 P4.11 P4.12 P4.14 P5.3 P6.1 Q3.1 Q4.2 Q7.2 Q12.2 Q17.2 Q25.2 Q26.2 R18.2 R33.2 R35.2 R37.2 R38.2 R48.1 R51.1 R59.1 S2.1 S2.2 SIM1.0 SIM1.5 U1.12 U1.18 U1.63 U2.8 U2.13 U2.19 U2.21 U2.27 U2.30 U2.31 U2.33 U2.36 U2.37 U2.45 U2.66 U2.67 U2.69 U2.70 U2.71 U2.72 U2.73 U2.74 U2.75 U2.76 U2.77 U3.1 U4.2 U5.1 U6.2 U6.3 U6.5 U34.5 | length 9872.3
  Top Layer w8: v2(345.78,1804.38) v2(459.95,1804.38) ; U2.74@350.02,1800.14 cw(c360.26,1789.89) 360.26,1804.38 cw(c360.26,1818.86) U2.74@350.02,1808.62 ; U2.74@360.78,1789.38 cw(c396.99,1753.17) 396.99,1804.38 cw(c396.99,1855.59) U2.74@360.78,1819.38 ; U2.74@366.44,1783.72 cw(c416.3,1733.85) 416.3,1804.38 cw(c416.3,1874.9) U2.74@366.44,1825.03 ; U2.74@372.09,1778.06 cw(c435.62,1714.54) 435.62,1804.38 cw(c435.62,1894.22) U2.74@372.09,1830.69 ; U2.74@377.75,1772.41 cw(c454.93,1695.23) 454.93,1804.38 cw(c454.93,1913.53) U2.74@377.75,1836.35 ; U4.2@426.24,2455.17 cw(c409.91,2438.85) 433,2438.85 ; U2.76@427.98,1712.33 ccw(c350.8,1789.51) 459.95,1789.51 ccw(c569.1,1789.51) U2.76@491.92,1712.33 ; U2.77@427.98,1762.57 cw(c350.8,1685.38) 459.95,1685.38 cw(c569.1,1685.38) U2.77@491.92,1762.57 ; U2.77@427.98,1772.41 ccw(c350.8,1695.23) 350.8,1804.38 ccw(c350.8,1913.53) U2.77@427.98,1836.35 ; U2.77@427.98,1846.19 ccw(c350.8,1923.37) 459.95,1923.37 ccw(c569.1,1923.37) U2.77@491.92,1846.19 ; U2.72@427.98,1896.42 cw(c350.8,1819.24) 459.95,1819.24 cw(c569.1,1819.24) U2.72@491.92,1896.42 ; U4.2@428.98,2466.77 433,2462.75 433,2436 440,2429 461,2429 478.98,2411.02 C16.1@478.98,2377.19 ; U2.76@433.64,1706.67 ccw(c370.11,1770.2) 459.95,1770.2 ccw(c549.79,1770.2) U2.76@486.27,1706.67 ; U2.77@433.64,1768.22 cw(c370.11,1704.7) 459.95,1704.7 cw(c549.79,1704.7) U2.77@486.27,1768.22 ; U2.77@433.64,1778.06 ccw(c370.11,1714.54) 370.11,1804.38 ccw(c370.11,1894.22) U2.77@433.64,1830.69 ; U2.77@433.64,1840.53 ccw(c370.11,1904.06) 459.95,1904.06 ccw(c549.79,1904.06) U2.77@486.27,1840.53 ; U2.72@433.64,1902.08 cw(c370.11,1838.56) 459.95,1838.56 cw(c549.79,1838.56) U2.72@486.27,1902.08 ; U2.76@439.3,1701.02 ccw(c389.43,1750.89) 459.95,1750.89 ccw(c530.48,1750.89) U2.76@480.61,1701.02 ; U2.77@439.3,1773.88 cw(c389.43,1724.01) 459.95,1724.01 cw(c530.48,1724.01) U2.77@480.61,1773.88 ; U2.77@439.3,1783.72 ccw(c389.43,1733.85) 389.43,1804.38 ccw(c389.43,1874.9) U2.77@439.3,1825.03 ; U2.77@439.3,1834.88 ccw(c389.43,1884.75) 459.95,1884.75 ccw(c530.48,1884.75) U2.77@480.61,1834.88 ; U2.72@439.3,1907.74 cw(c389.43,1857.87) 459.95,1857.87 cw(c530.48,1857.87) U2.72@480.61,1907.74 ; U2.76@444.95,1695.36 ccw(c408.74,1731.57) 459.95,1731.57 ccw(c511.16,1731.57) U2.76@474.95,1695.36 ; U2.77@444.95,1779.54 cw(c408.74,1743.32) 459.95,1743.32 cw(c511.16,1743.32) U2.77@474.95,1779.54 ; U2.77@444.95,1789.38 ccw(c408.74,1753.17) 408.74,1804.38 ccw(c408.74,1855.59) U2.77@444.95,1819.38 ; U2.77@444.95,1829.22 ccw(c408.74,1865.43) 459.95,1865.43 ccw(c511.16,1865.43) U2.77@474.95,1829.22 ; U2.72@444.95,1913.39 cw(c408.74,1877.18) 459.95,1877.18 cw(c511.16,1877.18) U2.72@474.95,1913.39 ; U2.72@455.71,1933.99 cw(c445.47,1923.75) 459.95,1923.75 cw(c474.44,1923.75) U2.72@464.19,1933.99 ; v2(459.95,1938.24) v2(459.95,1804.38) ; U2.76@463,1670.52 459.95,1673.57 v2(459.95,1804.38) ; C16.1@472.06,2384.1 ccw(c455.37,2400.8) 478.98,2400.8 ccw(c502.59,2400.8) C16.1@485.89,2384.1 ; U2.77@474.95,1789.38 cw(c511.16,1753.17) 511.16,1804.38 cw(c511.16,1855.59) U2.77@474.95,1819.38 ; C16.1@475,2381.16 C16.1@478.98,2377.19 ; U2.77@480.61,1783.72 cw(c530.48,1733.85) 530.48,1804.38 cw(c530.48,1874.9) U2.77@480.61,1825.03 ; U2.77@486.27,1778.06 cw(c549.79,1714.54) 549.79,1804.38 cw(c549.79,1894.22) U2.77@486.27,1830.69 ; C16.1@488.84,2370.27 cw(c505.54,2353.58) 505.54,2377.19 cw(c505.54,2400.8) C16.1@488.84,2384.1 ; U2.77@491.92,1772.41 cw(c569.1,1695.23) 569.1,1804.38 cw(c569.1,1913.53) U2.77@491.92,1836.35 ; v2@507.76,2372.95 ccw(c497.51,2362.7) 497.51,2377.19 ccw(c497.51,2391.67) v2@507.76,2381.43 ; v2@516.24,2372.95 cw(c526.49,2362.7) 526.49,2377.19 cw(c526.49,2391.67) v2@516.24,2381.43 ; C18.1@534.11,2370.27 ccw(c517.41,2353.58) 517.41,2377.19 ccw(c517.41,2400.8) C18.1@534.11,2384.1 ; U2.70@542.16,1772.41 ccw(c464.97,1695.23) 464.97,1804.38 ccw(c464.97,1913.53) U2.70@542.16,1836.35 ; C18.1@543.98,2377.19 v2(512,2377.19) C16.1@478.98,2377.19 ; U2.70@547.81,1778.06 ccw(c484.29,1714.54) 484.29,1804.38 ccw(c484.29,1894.22) U2.70@547.81,1830.69 ; U2.70@553.47,1783.72 ccw(c503.6,1733.85) 503.6,1804.38 ccw(c503.6,1874.9) U2.70@553.47,1825.03 ; U2.70@559.13,1789.38 ccw(c522.91,1753.17) 522.91,1804.38 ccw(c522.91,1855.59) U2.70@559.13,1819.38 ; U2.70@569.88,1800.14 ccw(c559.64,1789.89) 559.64,1804.38 ccw(c559.64,1818.86) U2.70@569.88,1808.62 ; v2(574.13,1804.38) v2(459.95,1804.38) ; U6.3@841,1423.3 U6.2@841,1442 U6.5@863.64,1442 ; U1.12@1762,1386.46 1801.46,1386.46 v2(1836,1421) ; v2@1830,1421 cw(c1815.51,1421) 1825.76,1410.76 cw(c1836,1400.51) v2@1836,1415 ; v2(1855,1136) 1880.11,1161.11 U1.18@1880.11,1209.3 ; v2@1855,1142 ccw(c1855,1156.49) 1865.24,1146.24 ccw(c1875.49,1136) v2@1861,1136 ; v2@1868,1770 cw(c1868,1755.51) 1878.24,1765.76 cw(c1888.49,1776) v2@1874,1776 ; v2(1868,1776) 1880.11,1763.89 U1.63@1880.11,1701.43 ; v2@1999.76,2086.76 cw(c1989.51,2076.51) 2004,2076.51 cw(c2018.49,2076.51) v2@2008.24,2086.76 ; 2002.52,1953.53 cw(c1985.94,1936.95) R35.2@2009.3,1934.91 ; v2(2004,2091) 2004,1952.06 R35.2@2022,1934.06 ; 2007.39,1948.66 ccw(c2019.05,1960.32) R35.2@2019.05,1943.83 ; v2(2348,1047) C89.1@2389,1047 C90.1@2461,1047 ; v2@2352.24,1042.76 cw(c2362.49,1032.51) 2362.49,1047 cw(c2362.49,1061.49) v2@2352.24,1051.24 ; C89.1@2379.13,1040.08 ccw(c2362.44,1023.39) 2362.44,1047 ccw(c2362.44,1070.61) C89.1@2379.13,1053.92 ; C89.1@2398.87,1040.08 cw(c2415.56,1023.39) 2415.56,1047 cw(c2415.56,1070.61) C89.1@2398.87,1053.92 ; C90.1@2451.13,1040.08 ccw(c2434.44,1023.39) 2434.44,1047 ccw(c2434.44,1070.61) C90.1@2451.13,1053.92 ; C19.1@2507.08,1567.87 ccw(c2490.39,1584.56) 2514,1584.56 ccw(c2537.61,1584.56) C19.1@2520.92,1567.87 ; C12.1@2507.08,1613.13 cw(c2490.39,1596.44) 2514,1596.44 cw(c2537.61,1596.44) C12.1@2520.92,1613.13 ; C19.1@2514,1558 C12.1@2514,1623 v2(2558,1623) ; C12.1@2520.92,1616.08 cw(c2537.61,1599.39) 2537.61,1623 cw(c2537.61,1646.61) C12.1@2520.92,1629.92 ; v2@2553.76,1618.76 ccw(c2543.51,1608.51) 2543.51,1623 ccw(c2543.51,1637.49) v2@2553.76,1627.24 ; U2.77@445.47,1804.38 cw(c445.47,1789.89) 455.71,1800.14 cw(c445.47,1789.89) 459.95,1789.89 cw(c474.44,1789.89) 464.19,1800.14 cw(c474.44,1789.89) 474.44,1804.38 cw(c474.44,1818.86) 464.19,1808.62 cw(c474.44,1818.86) 459.95,1818.86 cw(c445.47,1818.86) 455.71,1808.62 cw(c445.47,1818.86) U2.77@445.47,1804.38
  Top Layer w20: U2.75@318.05,1708.09 ccw(c251.11,1775.03) 345.78,1775.03 ccw(c440.45,1775.03) U2.75@373.51,1708.09 ; U2.74@318.05,1766.81 cw(c251.11,1699.87) 345.78,1699.87 cw(c440.45,1699.87) U2.74@373.51,1766.81 ; U2.74@318.05,1841.95 ccw(c251.11,1908.89) 345.78,1908.89 ccw(c440.45,1908.89) U2.74@373.51,1841.95 ; U2.73@318.05,1900.67 cw(c251.11,1833.73) 345.78,1833.73 cw(c440.45,1833.73) U2.73@373.51,1900.67 ; U2.75@345.78,1675.54 cw(c329.46,1675.54) v2(341,1664) cw(c356.74,1648.26) U2.75@356.74,1670.52 ; U2.75@373.51,1642.79 cw(c440.45,1575.85) 440.45,1670.52 cw(c440.45,1765.19) U2.75@373.51,1698.25 ; U2.73@373.51,1910.51 cw(c440.45,1843.57) 440.45,1938.24 cw(c440.45,2032.9) U2.73@373.51,1965.96 ; U2.76@432.22,1642.79 ccw(c365.28,1575.85) 365.28,1670.52 ccw(c365.28,1765.19) U2.76@432.22,1698.25 ; U2.72@432.22,1910.51 ccw(c365.28,1843.57) 365.28,1938.24 ccw(c365.28,2032.9) U2.72@432.22,1965.96 ; U2.76@459.95,1670.52 U2.75@345.78,1670.52 v2(345.78,1804.38) v2(345.78,1938.24) v2(459.95,1938.24) v2(574.13,1938.24) v2(574.13,1804.38) v2(574.13,1670.52) U2.76@463,1670.52 ; U2.76@487.68,1642.79 cw(c554.62,1575.85) 554.62,1670.52 cw(c554.62,1765.19) U2.76@487.68,1698.25 ; U2.72@487.68,1910.51 cw(c554.62,1843.57) 554.62,1938.24 cw(c554.62,2032.9) U2.72@487.68,1965.96 ; U2.69@546.4,1642.79 ccw(c479.46,1575.85) 479.46,1670.52 ccw(c479.46,1765.19) U2.69@546.4,1698.25 ; U2.69@546.4,1708.09 ccw(c479.46,1775.03) 574.13,1775.03 ccw(c668.79,1775.03) U2.69@601.85,1708.09 ; U2.70@546.4,1766.81 cw(c479.46,1699.87) 574.13,1699.87 cw(c668.79,1699.87) U2.70@601.85,1766.81 ; U2.70@546.4,1841.95 ccw(c479.46,1908.89) 574.13,1908.89 ccw(c668.79,1908.89) U2.70@601.85,1841.95 ; U2.71@546.4,1900.67 cw(c479.46,1833.73) 574.13,1833.73 cw(c668.79,1833.73) U2.71@601.85,1900.67 ; U2.71@546.4,1910.51 ccw(c479.46,1843.57) 479.46,1938.24 ccw(c479.46,2032.9) U2.71@546.4,1965.96 ; C199.1@2887,1085 C36.1@2947,1085
  Bottom Layer w8: C26.1@1236,1174.06 C41.1@1305,1174.06 1373,1174.06 C25.1@1374,1173.06 ; C26.1@1245.87,1167.14 cw(c1262.56,1150.45) 1262.56,1174.06 cw(c1262.56,1197.66) C26.1@1245.87,1180.97 ; C41.1@1295.13,1167.14 ccw(c1278.44,1150.45) 1278.44,1174.06 ccw(c1278.44,1197.66) C41.1@1295.13,1180.97 ; C41.1@1314.87,1167.14 cw(c1331.56,1150.45) 1331.56,1174.06 cw(c1331.56,1197.66) C41.1@1314.87,1180.97 ; 1345.02,1174.06 cw(c1345.02,1147.03) C25.1@1364.13,1166.14 ; 1349.85,1174.06 ccw(c1349.85,1194.25) C25.1@1364.13,1179.97
  other v1: 824,160 348,204 840,259 2016,309 1615,312 1206,314 339,331 848,376 3302,442 180,454 898,490 3178,508 180,526 3312,537 3157,580 3361,580 420,631 2326,645 -21,692 560,729 716,730 1938,788 999,790 1674,803 2005,850 1114,864 -1,866 1738,871 2651,887 2774,887 3378,890 3066,892 3203,895 3003,900 333,914 3295,921 2178,953 2469,954 1754,971 2590,974 1832,984 2422,987 2265,1034 1794,1036 830,1040 1701,1040 1160,1073 2278,1077 1614,1078 797,1099 16,1103 1731,1106 1801,1128 2359,1170 2496,1181 2305,1187 1720,1193 183,1198 1815,1199 2939,1227 787,1257 2253,1275 802,1327 35,1376 805,1413 693,1430 2112,1431 1983,1434 120,1451 3096,1456 3305,1497 3368,1497 3069,1524 2989,1543 246,1567 1996,1597 3268,1599 -68,1605 3062,1626 2743,1627 2986,1653 -18,1654 2323,1661 70,1667 1448,1689 1331,1704 2586,1745 2690,1747 44,1775 3077,1837 2329,1853 -9,1873 2205,1875 2955,1895 1311,1919 2326,1919 3004,2006 -23,2032 1162,2037 1343,2042 2201,2050 3041,2063 2947,2074 80,2123 837,2128 1409,2166 1861,2176 702,2194 0,2196 158,2199 2696,2215 759,2236 248,2245 616,2245 1078,2299 75,2307 1482,2360 1946,2371 1265,2372 2799,2394 1686,2396 41,2399 2579,2400 2720,2407 1851,2449 665,2462 236,2485 36,2505 654,2552 199,2559 2446,2576 2786,2592 2596,2596 1110,2597 1413,2644 647,2654 2222,2724 2423,2758 1842,2763 3063,2769 901,2784 2986,2804 2570,2815 2443,2832 2224,2849 1494,2860 1177,2882 2690,2892 1834,2905 651,2931 2443,2963 2220,2973 3046,3003 -39,3023 2702,3023 1304,3030 1838,3042 601,3053 1034,3057 989,3108 2435,3121 1167,3126 2203,3130 3046,3166 1834,3199 2598,3224 2196,3240 2702,3254 438,3266 3189,3308 273,3325 66,3356 466,3367 3331,3390 2463,3419 388,3435 584,3463 3139,3512 2335,3513 1393,3534 2680,3539 1174,3554 3285,3561 2544,3571 3110,3610 2380,3661 1248,3663 547,3667 1039,3674 1612,3729 1474,3758 2517,3775 2748,3795 2645,3849 1617,3856 1049,3888 2712,3948 1272,3950 2436,3950 2266,3967 2552,3967 1391,4029
CTRL1+: R3.1 U1.40 | length 1195.7
  Top Layer w8: U1.40@2254.13,1445.52 2317.52,1445.52 2353,1481 v2(2534.54,1481) ; v2@2530.29,1476.76 ccw(c2520.05,1466.51) 2520.05,1481 ccw(c2520.05,1495.49) v2@2530.29,1485.24
  Bottom Layer w8: R3.1@2527.62,2292.08 cw(c2510.93,2275.39) 2534.54,2275.39 cw(c2558.15,2275.39) R3.1@2541.45,2292.08 ; v2@2530.29,1485.24 ccw(c2520.05,1495.49) 2534.54,1495.49 ccw(c2549.02,1495.49) v2@2538.78,1485.24 ; v2(2534.54,1481) R3.1@2534.54,2299
CTRL1_O: P4.6 Q1.3 | length 562.5
  Bottom Layer w40: Q1.3@2902.76,2302 2902.76,2209.24 2942,2170 3093.83,2170 3197.83,2274 P4.6@3237.87,2274 ; 3150.36,2226.54 cw(c3218.19,2158.71) P4.6@3218.19,2254.63
CTRL1OUT1: P2.2 Q5.2 | length 355.3
  Top Layer w20: P2.2@1108,180.06 1108,297 1170,359 1170,457 1152,475 Q5.2@1124.74,475
CTRL1OUT2: P2.4 Q2.2 | length 340.9
  Top Layer w20: P2.4@1308,180.06 1308,292.17 1347,331.17 1347,447.34 Q2.2@1319.34,475 ; Q2.2@1319.34,465.32 cw(c1319.34,441.93) 1335.87,458.47
CTRL1OUT3: P2.6 Q6.2 | length 349.6
  Top Layer w20: P2.6@1508,176.13 1511,179.13 1511,277 1550,316 1550,438.94 Q6.2@1513.94,475 ; Q6.2@1513.94,465.32 cw(c1513.94,441.93) 1530.47,458.47
CTRL1OUT11: Q5.3 R7.1 U1.15 | length 1395.1
  Top Layer w8: R7.1@1087,663 1193,769 1590,769 1659,838 v2(1659,1003) ; v2@1654.76,998.76 cw(c1644.51,988.51) 1659,988.51 cw(c1673.49,988.51) v2@1663.24,998.76 ; v2@1654.76,1198.24 ccw(c1644.51,1208.49) 1659,1208.49 ccw(c1673.49,1208.49) v2@1663.24,1198.24 ; v2(1659,1194) 1659,1288 1698.41,1327.41 U1.15@1762,1327.41
  Top Layer w20: Q5.3@1085.37,573.43 1087,575.06 R7.1@1087,663
  Bottom Layer w8: v2@1654.76,1007.24 ccw(c1644.51,1017.49) 1659,1017.49 ccw(c1673.49,1017.49) v2@1663.24,1007.24 ; v2@1654.76,1189.76 cw(c1644.51,1179.51) 1659,1179.51 cw(c1673.49,1179.51) v2@1663.24,1189.76 ; v2(1659,1003) v2(1659,1194)
CTRL1OUT21: Q2.3 R19.1 U1.23 | length 1158.4
  Top Layer w8: R19.1@1283.17,663 1348,663 1430,745 1673,745 1978.54,1050.54 U1.23@1978.54,1209.3 ; R19.1@1290.08,656.08 cw(c1306.78,639.39) 1306.78,663 cw(c1306.78,686.61) R19.1@1290.08,669.92
  Top Layer w20: Q2.3@1279.97,573.43 1279.97,659.8 R19.1@1283.17,663 ; 1279.97,643.21 cw(c1300.01,643.21) R19.1@1285.84,657.37
CTRL1OUT31: Q6.3 R26.1 U1.24 | length 1018.8
  Top Layer w8: R26.1@1472.42,672.87 ccw(c1455.72,689.56) 1479.33,689.56 ccw(c1502.94,689.56) R26.1@1486.25,672.87 ; R26.1@1479.33,663 1479.33,690.33 1510,721 1696,721 1998.22,1023.22 U1.24@1998.22,1209.3
  Top Layer w20: Q6.3@1474.57,573.43 1474.57,658.24 R26.1@1479.33,663 ; 1474.57,639.42 cw(c1499.96,639.42) R26.1@1482.01,657.37
CTRL2+: R12.1 U1.36 | length 1401.2
  Top Layer w8: U1.36@2254.13,1366.78 2394.78,1366.78 v2(2429.55,1401.55) ; v2@2423.55,1401.55 cw(c2409.06,1401.55) 2419.3,1391.3 cw(c2429.55,1381.06) v2@2429.55,1395.55
  Bottom Layer w8: v2(2429.55,1401.55) 2468,1440 2468,2390 R12.1@2556,2478 ; v2@2429.55,1407.55 ccw(c2429.55,1422.03) 2439.79,1411.79 ccw(c2450.03,1401.55) v2@2435.55,1401.55 ; 2534.26,2456.26 ccw(c2512.53,2478) R12.1@2543.27,2478 ; 2541.39,2463.39 cw(c2553.05,2451.74) R12.1@2553.05,2468.22
CTRL2_O: P4.8 Q11.3 | length 546.2
  Bottom Layer w40: Q11.3@2904.23,2479 2904.23,2541.23 2961.53,2598.53 3073.47,2598.53 3198,2474 P4.8@3237.87,2474 ; 3150.66,2521.34 ccw(c3218.19,2588.87) P4.8@3218.19,2493.37
CTRL2OUT1: P2.8 Q8.2 | length 347.7
  Top Layer w20: P2.8@1708,176.13 1708,306 1745,343 1745,438.54 Q8.2@1708.54,475 ; Q8.2@1708.54,465.32 cw(c1708.54,441.93) 1725.07,458.47
CTRL2OUT2: P2.10 Q9.2 | length 367.4
  Top Layer w20: Q9.2@1903.14,475 1935,475 1961,449 1961,339.17 1908,286.17 P2.10@1908,172.19
CTRL2OUT3: P2.12 Q10.2 | length 345
  Top Layer w20: Q10.2@2097.74,475 2113,475 2143,445 2143,342 2108,307 P2.12@2108,172.19
CTRL2OUT11: Q8.3 R36.1 U1.25 | length 817.1
  Top Layer w8: R36.1@1669.17,656.67 1669.17,676.82 1677,684.65 1677,686 1695,704 1716.5,704 2017.91,1005.41 U1.25@2017.91,1209.3
  Top Layer w20: Q8.3@1669.17,573.43 R36.1@1669.17,656.67 ; 1669.17,635.64 cw(c1699.91,635.64) R36.1@1678.17,657.37
CTRL2OUT21: Q9.3 R9.1 U1.26 | length 745
  Top Layer w8: R9.1@1857.08,672.87 ccw(c1840.39,689.56) 1864,689.56 ccw(c1887.61,689.56) R9.1@1870.92,672.87 ; R9.1@1864,663 1864,776 2037.59,949.59 U1.26@2037.59,1209.3
  Top Layer w20: Q9.3@1863.77,573.43 1864,573.66 R9.1@1864,663
CTRL2OUT31: Q10.3 R10.1 U1.27 | length 673.4
  Top Layer w8: R10.1@2051.08,671.87 ccw(c2036.14,686.81) 2057.28,686.81 ; 2057.28,690.31 ccw(c2083.36,690.31) R10.1@2064.92,671.87 ; U1.27@2057.28,1209.3 2057.28,662.72 R10.1@2058,662
  Top Layer w20: R10.1@2058,662 2058,573.8 Q10.3@2058.37,573.43
CTRL3+: R32.1 U1.39 | length 1532.5
  Top Layer w8: U1.39@2254.13,1425.83 2326.83,1425.83 2353,1452 v2(2430,1452) ; v2@2425.76,1447.76 ccw(c2415.51,1437.51) 2415.51,1452 ccw(c2415.51,1466.49) v2@2425.76,1456.24
  Bottom Layer w8: v2(2430,1452) 2448,1470 2448,2511 2539,2602 R32.1@2539,2670 ; v2@2430,1458 ccw(c2430,1472.49) 2440.24,1462.24 ccw(c2450.49,1452) v2@2436,1452 ; R32.1@2532.08,2663.08 cw(c2515.39,2646.39) 2539,2646.39 cw(c2562.61,2646.39) R32.1@2545.92,2663.08
CTRL3_O: P4.10 Q16.3 | length 335.8
  Bottom Layer w40: Q16.3@2907.23,2677 2910.23,2674 P4.10@3241.81,2674
CTRL3OUT1: P2.14 Q14.2 | length 323.2
  Top Layer w20: Q14.2@2304.74,445.32 cw(c2304.74,421.93) 2321.27,438.47 ; Q14.2@2304.74,455 2333,426.74 2333,302 2309,278 2309,173.19 P2.14@2308,172.19
CTRL3OUT2: P4.2 Q15.2 | length 632.7
  Top Layer w8: Q15.2@2664.68,1955.69 3027.31,1955.69 3109,1874 P4.2@3233.94,1874 ; Q15.2@2678.08,1950.16 cw(c2691.42,1936.83) 2691.42,1955.69 cw(c2691.42,1974.54) Q15.2@2678.08,1961.21
CTRL3OUT3: P4.4 Q13.2 | length 648.9
  Top Layer w8: Q13.2@2652.68,2165.74 3017.26,2165.74 3109,2074 P4.4@3233.94,2074 ; Q13.2@2666.08,2160.22 cw(c2679.42,2146.88) 2679.42,2165.74 cw(c2679.42,2184.6) Q13.2@2666.08,2171.26
CTRL3OUT11: Q14.3 R27.1 U1.28 | length 771
  Top Layer w8: U1.28@2076.96,1209.3 2076.96,941.04 2264,754 R27.1@2264,663 ; R27.1@2257.08,672.87 ccw(c2240.39,689.56) 2264,689.56 ccw(c2287.61,689.56) R27.1@2270.91,672.87
  Top Layer w20: R27.1@2264,663 2264,554.8 Q14.3@2265.37,553.43